# Altium PCB DC_Switch_2_5V_L.PcbDoc
Units mm, origin at the board's own origin, x right, y up, seen from the top; angles counter-clockwise.
Board outline 106.04 x 81.91 mm, 2 copper layers (Top Layer, Bottom Layer); 24 components, 104 nets, 306 pads, 77 vias.
Unrouted connection lines stored in the file: 5.
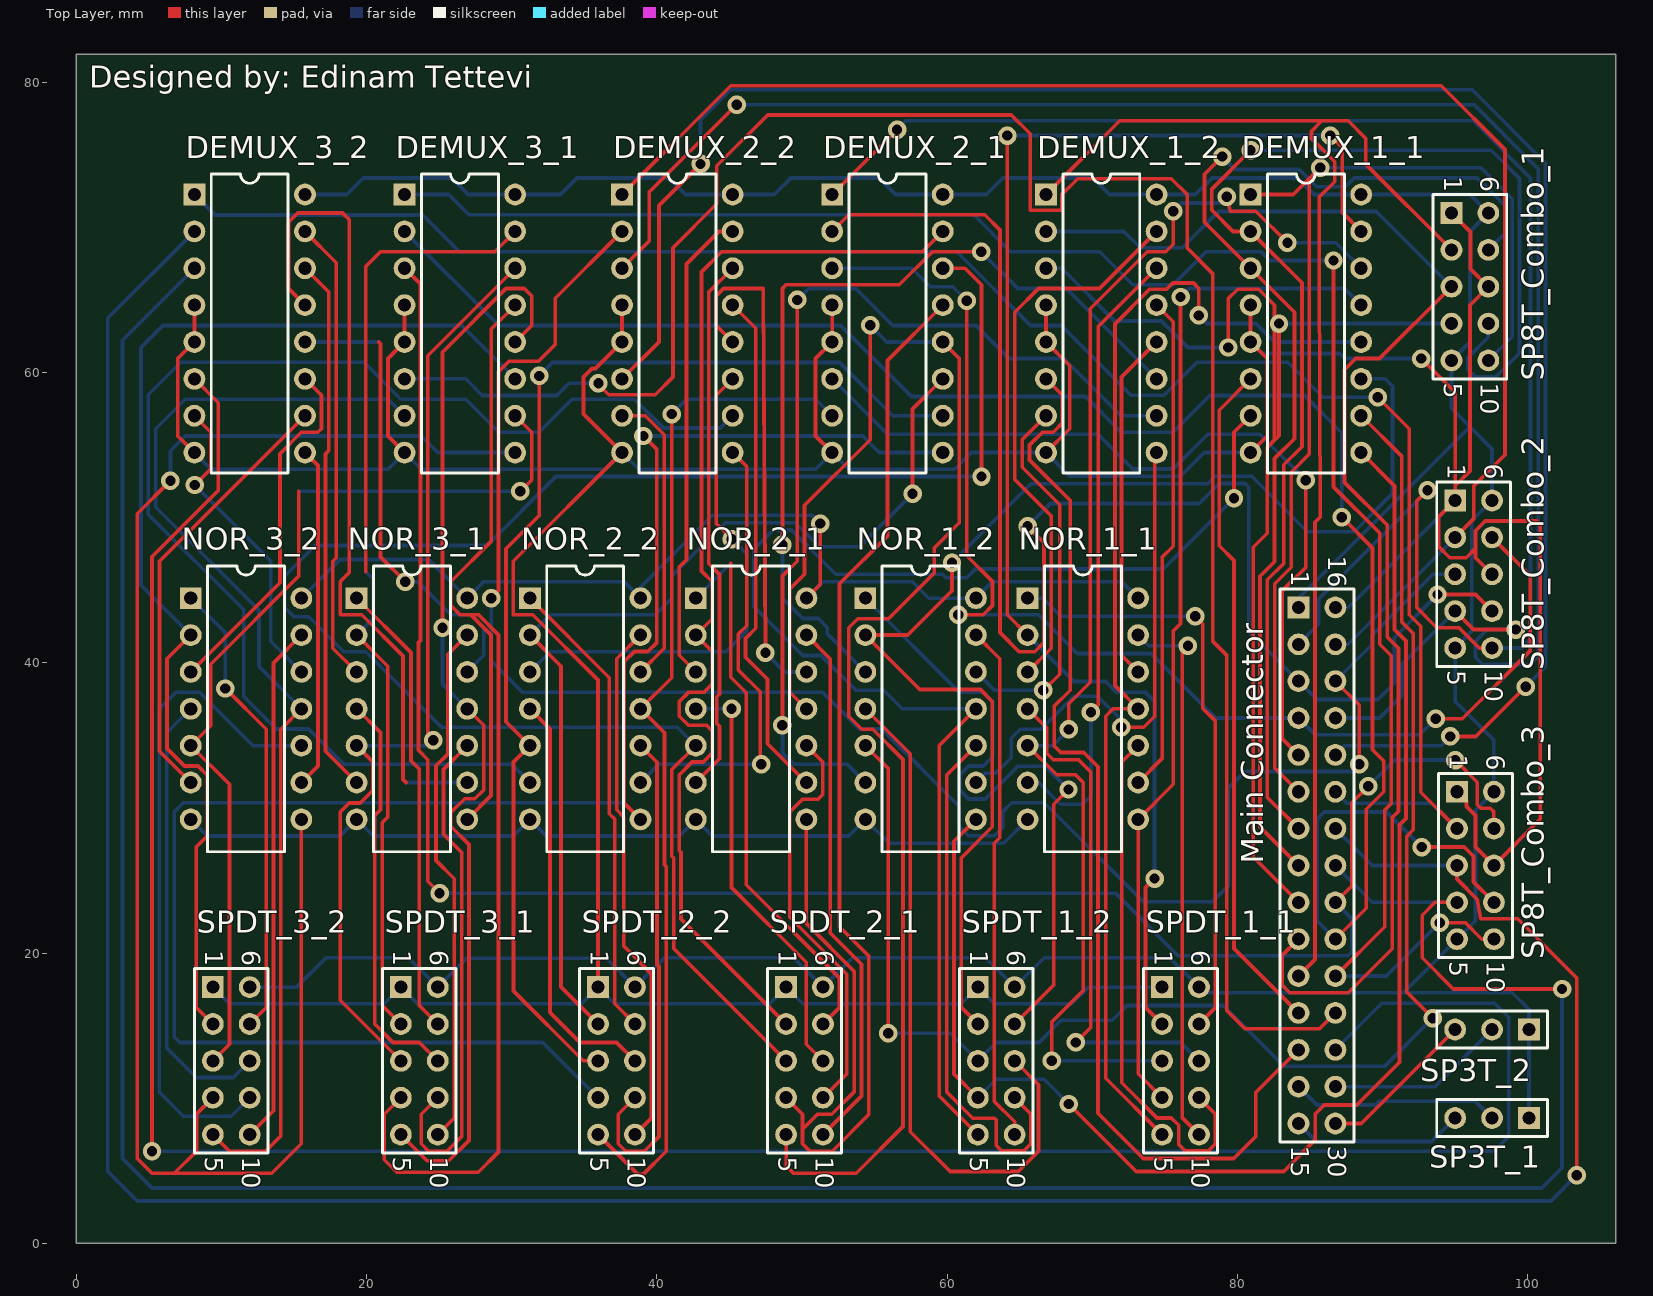
[diagram p0: Top Layer view]
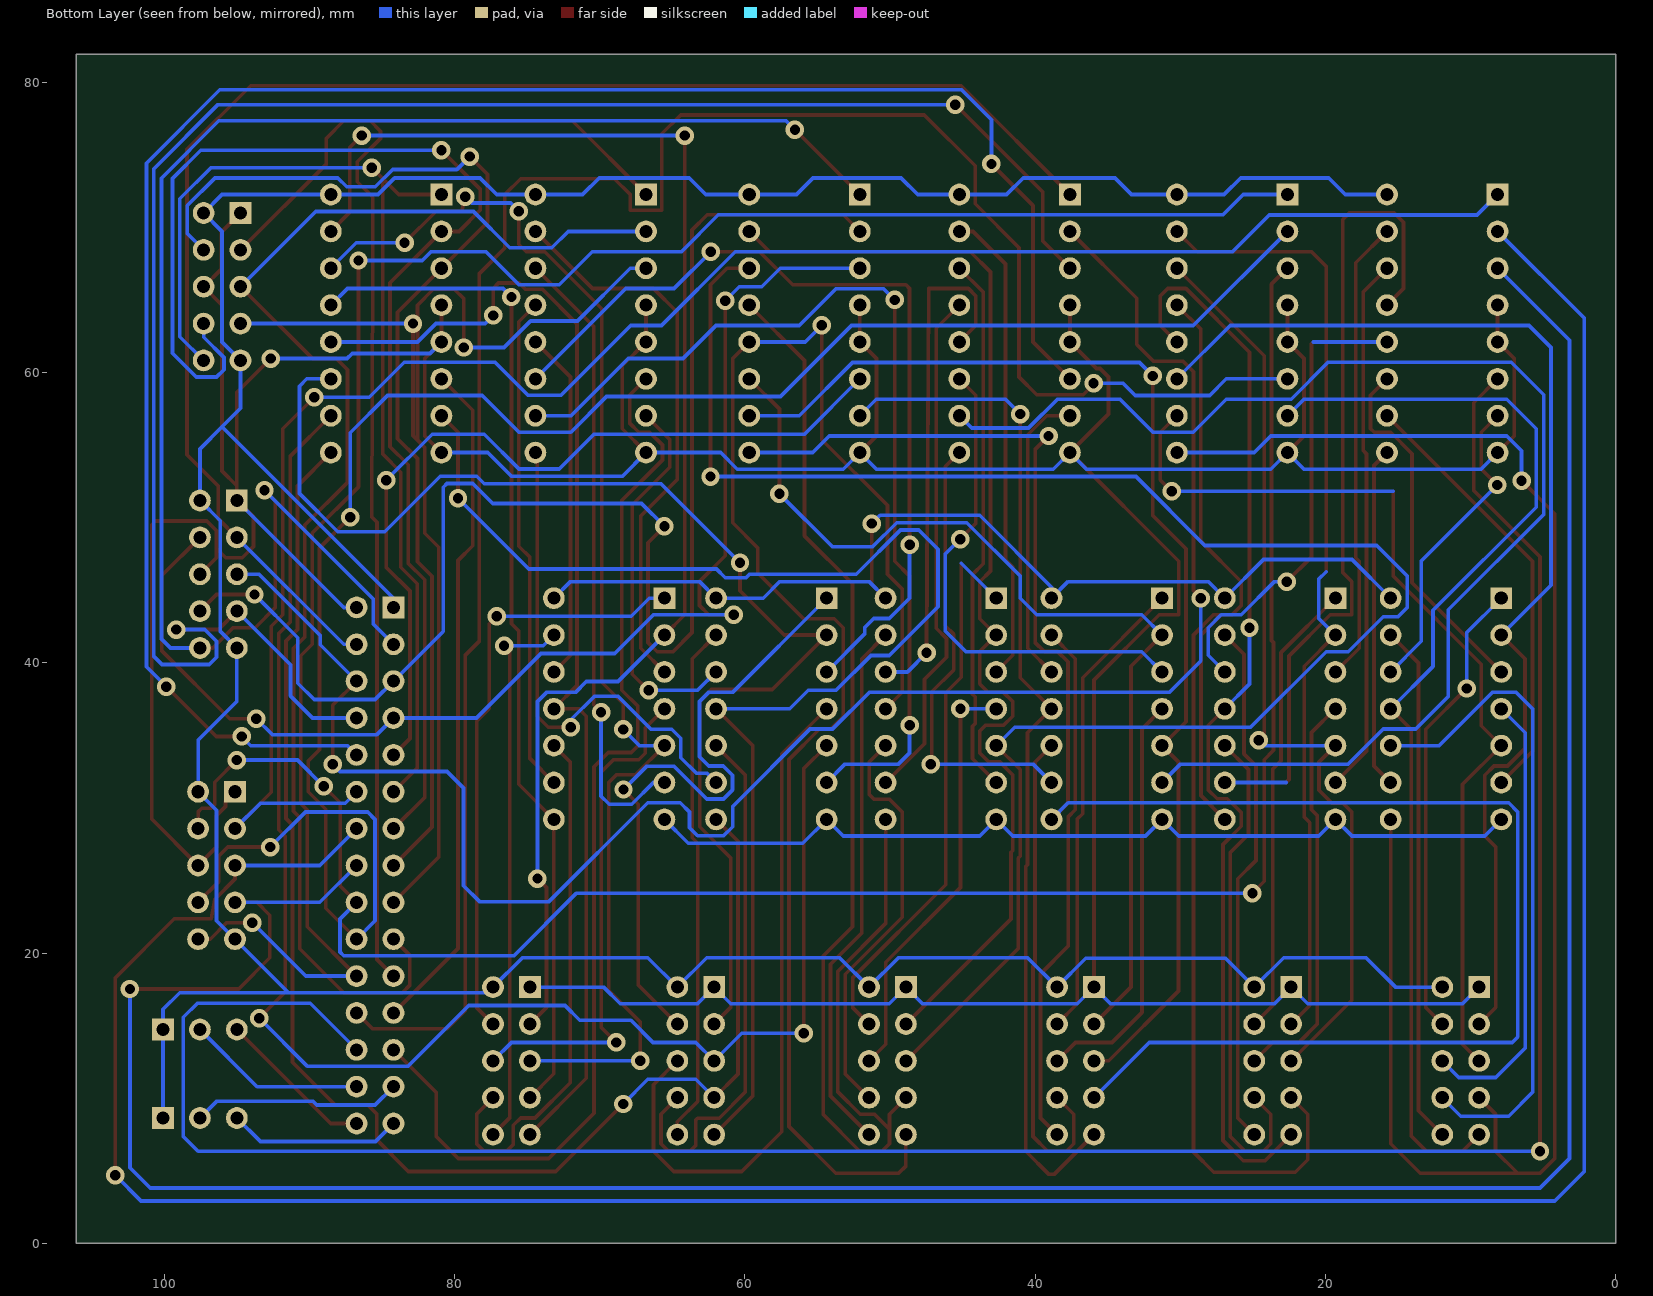
[diagram p1: Bottom Layer view, seen from below]

## Layer stack, top to bottom
Top Solder: solder mask 0.0102, Solder Resist, Dk 3.5
Top Layer: signal copper 0.0356
Dielectric 1: dielectric 0.32, FR-4, Dk 4.8
Bottom Layer: signal copper 0.0356
Bottom Solder: solder mask 0.0102, Solder Resist, Dk 3.5

## Board outline
0,0 106.045,0 106.045,81.915 0,81.915

## Design rules (kind name [scope] priority, off if disabled: settings)
Clearance [All] p1: gap=0.203
PolygonConnect [All] p1: connectstyle=Relief reliefconductorwidth=0.254 reliefentries=4 polygonreliefangle="90 Angle" airgapwidth=0.254
RoutingVias [All] p1: holewidth=0.711 width=1.27 viastyle="Through Hole" minholewidth=0.711 minwidth=1.27 maxholewidth=0.711 maxwidth=1.27
SolderMaskExpansion [All] p1: expansion=0.102
Width [All] p1: maxlimit=0.254 minlimit=0.254 preferedwidth=0.254
30 further rules are at their usual default settings.

## Components (designator, comment, footprint, x,y, rotation, side; value= is the part's Value field where it differs from the comment)
DEMUX_1_1 "CD54HCT238" J016D 84.709,63.373 r270 top
DEMUX_1_2 "CD54HCT238" J016D 70.612,63.373 r270 top
DEMUX_2_1 "CD54HCT238" J016D 55.88,63.373 r270 top
DEMUX_2_2 "CD54HCT238" J016D 41.402,63.373 r270 top
DEMUX_3_1 "CD54HCT238" J016D 26.416,63.373 r270 top
DEMUX_3_2 "CD54HCT238" J016D 11.938,63.373 r270 top
"Main Connector" "Arduino Pins" HDR2X15_CEN 84.201,43.815 r270 top
NOR_1_1 "SN74HC02N" N014 69.342,36.83 r270 top
NOR_1_2 "SN74HC02N" N014 58.166,36.83 r270 top
NOR_2_1 "SN74HC02N" N014 46.482,36.83 r270 top
NOR_2_2 "SN74HC02N" N014 35.052,36.83 r270 top
NOR_3_1 "SN74HC02N" N014 23.114,36.83 r270 top
NOR_3_2 "SN74HC02N" N014 11.684,36.83 r270 top
SP3T_1 "Cntrl" HDR1X3 100.076,8.636 r180 top
SP3T_2 "Cntrl" HDR1X3 100.076,14.732 r180 top
SP8T_Combo_1 "Cntrl" HDR2X5_CEN 94.742,70.993 r270 top
SP8T_Combo_2 "Cntrl" HDR2X5_CEN 94.996,51.181 r270 top
SP8T_Combo_3 "Cntrl" HDR2X5_CEN 95.123,31.115 r270 top
SPDT_1_1 "Cntrl" HDR2X5_CEN 74.803,17.653 r270 top
SPDT_1_2 "Cntrl" HDR2X5_CEN 62.103,17.653 r270 top
SPDT_2_1 "Cntrl" HDR2X5_CEN 48.895,17.653 r270 top
SPDT_2_2 "Cntrl" HDR2X5_CEN 35.941,17.653 r270 top
SPDT_3_1 "Cntrl" HDR2X5_CEN 22.352,17.653 r270 top
SPDT_3_2 "Cntrl" HDR2X5_CEN 9.398,17.653 r270 top

## Footprints (in the part's own frame and the unit in brackets; to place one, negate y for a bottom-side part, rotate by r counter-clockwise, add the part's x,y. Pads: shape width x height; smd on the part's side, far side on the other; paste and mask are expansions set on the pad)
HDR1X3 [mm] "Connector; Header; 3 Position"
  rect 1.5x1.5 hole 0.9: 1(0,0)
  round 1.5 hole 0.9: 2(2.54,0) 3(5.08,0)
  silkscreen extent -1.27,-1.27 6.35,1.27
HDR2X5_CEN [mm] "Connector; Header; 5x2 Position"
  rect 1.5x1.5 hole 0.9: 1(0,0)
  round 1.5 hole 0.9: 2(2.54,0) 3(5.08,0) 4(7.62,0) 5(10.16,0) 6(0,2.54) 7(2.54,2.54) 8(5.08,2.54) 9(7.62,2.54) 10(10.16,2.54)
  silkscreen extent -1.27,-1.27 11.43,3.81
HDR2X15_CEN [mm] "Connector; Header; 15x2 Position"
  rect 1.5x1.5 hole 0.9: 1(0,0)
  round 1.5 hole 0.9: 2(2.54,0) 3(5.08,0) 4(7.62,0) 5(10.16,0) 6(12.7,0) 7(15.24,0) 8(17.78,0) 9(20.32,0) 10(22.86,0) 11(25.4,0) 12(27.94,0) 13(30.48,0) 14(33.02,0) 15(35.56,0) 16(0,2.54) 17(2.54,2.54) 18(5.08,2.54) 19(7.62,2.54) 20(10.16,2.54) 21(12.7,2.54) 22(15.24,2.54) 23(17.78,2.54) 24(20.32,2.54) 25(22.86,2.54) 26(25.4,2.54) 27(27.94,2.54) 28(30.48,2.54) 29(33.02,2.54) 30(35.56,2.54)
  silkscreen extent -1.27,-1.27 36.83,3.81
J016D [mm] "DIP; 16 Leads; Row Spacing 7.62 mm; Pitch 2.54 mm"
  rect 1.5x1.5 hole 0.9: 1(-8.89,-3.81)
  round 1.5 hole 0.9: 2(-6.35,-3.81) 3(-3.81,-3.81) 4(-1.27,-3.81) 5(1.27,-3.81) 6(3.81,-3.81) 7(6.35,-3.81) 8(8.89,-3.81) 9(8.89,3.81) 10(6.35,3.81) 11(3.81,3.81) 12(1.27,3.81) 13(-1.27,3.81) 14(-3.81,3.81) 15(-6.35,3.81) 16(-8.89,3.81)
  silkscreen extent -10.3,-2.65 10.3,2.65
N014 [mm] "DIP; 14 Leads; Row Spacing 7.62 mm; Pitch 2.54 mm"
  rect 1.5x1.5 hole 0.9: 1(-7.62,-3.81)
  round 1.5 hole 0.9: 2(-5.08,-3.81) 3(-2.54,-3.81) 4(0,-3.81) 5(2.54,-3.81) 6(5.08,-3.81) 7(7.62,-3.81) 8(7.62,3.81) 9(5.08,3.81) 10(2.54,3.81) 11(0,3.81) 12(-2.54,3.81) 13(-5.08,3.81) 14(-7.62,3.81)
  silkscreen extent -9.85,-2.65 9.85,2.65

## Part data
DEMUX_1_1 DEMUX_1_2 DEMUX_2_1 DEMUX_2_2 DEMUX_3_1 DEMUX_3_2: library part SN54HC238J, "3-Line to 8-Line Decoder / Demultiplexer"
"Main Connector": library part "Header 15X2A", "Header, 15-Pin, Dual row"
NOR_1_1 NOR_1_2 NOR_2_1 NOR_2_2 NOR_3_1 NOR_3_2: "Quadruple 2-Input Positive-NOR Gate"
SP3T_1 SP3T_2: library part "Header 3", "Header, 3-Pin"
SP8T_Combo_1 SP8T_Combo_2 SP8T_Combo_3 SPDT_1_1 SPDT_1_2 SPDT_2_1 SPDT_2_2 SPDT_3_1 SPDT_3_2: library part "Header 5X2A", "Header, 5-Pin, Dual row"

## Via types
v1: diameter 1.27, hole 0.711, Top Layer to Bottom Layer, 77 vias

## Nets (pads, with @x,y where several pads share a name; then routed paths per layer and width w, separated by ;. In a path a pad name is that pad's centre, name@x,y a point inside that pad or via, vN(x,y) a via of type N, cw(c..) or ccw(c..) an arc to the next point about the centre after c; other vN are vias at no path point)
GND: NOR_1_1.7 NOR_1_2.7 NOR_2_1.7 NOR_2_2.7 NOR_3_1.7 NOR_3_2.7 | length 62.8
  Bottom Layer w0.254: NOR_3_2.7 9.017,28.067 18.161,28.067 NOR_3_1.7 20.447,28.067 30.099,28.067 NOR_2_2.7 32.385,28.067 41.529,28.067 NOR_2_1.7 43.815,28.067 53.213,28.067 NOR_1_2.7 55.995,27.571 63.893,27.571 NOR_1_1.7
NetDEMUX_1_1_1: "Main Connector.6" DEMUX_1_1.1 SP8T_Combo_1.10 | length 75.4
  Top Layer w0.254: 84.201,31.115 82.562,32.754 82.562,45.454 83.693,46.585 83.693,53.134 84.944,54.385 84.944,73.362 v1(85.7,74.117)
  Top Layer w0.255: DEMUX_1_1.1 83.845,72.263 84.944,73.362
  Bottom Layer w0.254: SP8T_Combo_1.10 98.921,62.472
  Bottom Layer w0.255: v1(85.7,74.117) 96.774,74.117 98.921,71.97 98.921,62.472
NetDEMUX_1_1_2: "Main Connector.7" DEMUX_1_1.2 SP8T_Combo_1.9 | length 92.6
  Top Layer w0.254: DEMUX_1_1.2 84.436,66.186 84.436,54.893 83.185,53.642 83.185,46.846 82.054,45.715 82.054,30.722 84.201,28.575
  Top Layer w0.255: DEMUX_1_1.2 79.694,69.723 78.232,71.185 78.232,72.644 v1(80.899,75.311)
  Bottom Layer w0.255: v1(80.899,75.311) 97.485,75.311 99.429,73.367 99.429,61.329 97.79,59.69 96.393,59.69 95.885,60.198 95.885,61.036 97.282,62.433 SP8T_Combo_1.9
NetDEMUX_1_1_3: "Main Connector.8" DEMUX_1_1.3 SP8T_Combo_1.7 | length 78.9
  Top Layer w0.254: v1(78.943,74.879) 77.724,73.66 77.724,70.358 DEMUX_1_1.3 83.922,64.16 83.922,55.443 82.55,54.072 82.55,46.965 81.546,45.961 81.546,28.69 84.201,26.035
  Bottom Layer w0.254: v1(78.943,74.879) 79.832,73.99 84.259,73.99 85.453,72.796 87.427,72.796 88.036,73.406 96.508,73.406 98.413,71.501 98.413,69.584 SP8T_Combo_1.7
NetDEMUX_1_1_4: "Main Connector.16" DEMUX_1_1.4 DEMUX_1_1.5 DEMUX_1_1.8 DEMUX_1_2.4 DEMUX_1_2.5 DEMUX_1_2.8 DEMUX_2_1.4 DEMUX_2_1.5 DEMUX_2_1.8 DEMUX_2_2.4 DEMUX_2_2.5 DEMUX_2_2.8 DEMUX_3_1.4 DEMUX_3_1.5 DEMUX_3_1.8 DEMUX_3_2.4 DEMUX_3_2.5 DEMUX_3_2.8 SP8T_Combo_1.1 SP8T_Combo_1.8 SP8T_Combo_2.1 SP8T_Combo_2.8 SP8T_Combo_3.1 SP8T_Combo_3.8 SPDT_1_1.1 SPDT_1_2.1 SPDT_2_1.1 SPDT_2_2.1 SPDT_3_1.1 SPDT_3_2.1 | length 360.8
  Top Layer w0.254: DEMUX_3_2.8 6.985,55.626 6.985,60.96 DEMUX_3_2.5 DEMUX_3_2.4 ; DEMUX_3_1.8 21.463,55.626 21.463,60.96 DEMUX_3_1.5 DEMUX_3_1.4 ; SPDT_2_2.1 35.941,38.811 31.445,43.307 30.099,43.307 30.099,46.99 DEMUX_2_2.8 34.937,57.138 34.937,59.69 35.528,60.281 35.77,60.281 DEMUX_2_2.5 DEMUX_2_2.4 ; DEMUX_2_1.8 50.927,55.626 50.927,60.96 DEMUX_2_1.5 DEMUX_2_1.4 ; DEMUX_1_2.8 68.441,56.122 68.441,60.464 DEMUX_1_2.5 DEMUX_1_2.4 ; DEMUX_1_1.8 82.042,55.626 82.042,60.96 DEMUX_1_1.5 DEMUX_1_1.4 ; v1(92.659,60.96) 94.996,58.623 94.996,52.197 ; SP8T_Combo_1.1 96.054,69.681 96.054,67.141 SP8T_Combo_1.8 96.012,64.643 96.012,53.213 94.996,52.197 ; SP8T_Combo_2.1 94.996,52.197 ; SP8T_Combo_3.1 95.771,30.467 95.771,30.098 96.393,29.476 96.393,27.305 SP8T_Combo_3.8 100.863,29.235 100.863,49.518 100.609,49.772 97.068,49.772 96.393,49.098 96.393,47.879 96.393,47.244 SP8T_Combo_2.8
  Top Layer w0.255: SP8T_Combo_2.1 93.853,50.038 93.853,48.006 94.615,47.244 95.758,47.244 96.393,47.879
  Bottom Layer w0.254: DEMUX_3_2.8 9.271,53.34 21.463,53.34 DEMUX_3_1.8 23.749,53.34 36.449,53.34 DEMUX_2_2.8 38.735,53.34 50.927,53.34 DEMUX_2_1.8 53.213,53.34 60.514,53.34 61.657,54.483 DEMUX_1_2.8 68.441,52.844 76.061,52.844 77.7,54.483 DEMUX_1_1.8 ; SPDT_3_2.1 10.541,16.51 21.209,16.51 SPDT_3_1.1 23.495,16.51 34.798,16.51 SPDT_2_2.1 37.084,16.51 47.752,16.51 SPDT_2_1.1 50.038,16.51 60.96,16.51 SPDT_1_2.1 63.246,16.51 68.58,16.51 69.723,17.653 SPDT_1_1.1 ; DEMUX_1_1.5 81.686,61.316 87.046,61.316 87.401,60.96 v1(92.659,60.96) ; 86.741,43.815 87.63,43.815 SP8T_Combo_2.1
NetDEMUX_1_1_6: "Main Connector.12" DEMUX_1_1.6 | length 46.8
  Top Layer w0.254: DEMUX_1_1.6 78.74,57.404 78.74,48.063 79.756,47.047 79.756,20.32 84.201,15.875
NetDEMUX_1_1_7: DEMUX_1_1.7 NOR_1_2.11 SPDT_1_2.5 | length 97.1
  Top Layer w0.254: NOR_1_2.11 59.448,34.302 59.448,10.148 SPDT_1_2.5
  Top Layer w0.255: v1(79.756,51.333) 79.756,55.88 DEMUX_1_1.7
  Bottom Layer w0.255: NOR_1_2.11 56.896,36.83 55.626,38.1 53.709,38.1 51.308,40.501 50.038,40.501 46.685,43.854 46.685,47.828 48.006,49.149 49.276,49.149 52.324,46.101 59.665,46.101 59.908,45.857 61.341,45.857 61.94,46.457 74.879,46.457 v1(79.756,51.333)
NetDEMUX_1_1_9: DEMUX_1_1.9 NOR_1_2.8 SPDT_1_2.4 | length 100.3
  Top Layer w0.254: NOR_1_2.8 60.464,27.698 60.464,11.672 SPDT_1_2.4 ; v1(68.377,9.601) 73.025,4.953 83.185,4.953 85.344,7.112 85.344,8.89 85.979,9.525 88.214,9.525 91.161,12.471 91.161,28.829 91.602,29.27 91.602,41.506 90.817,42.291 90.817,52.185 DEMUX_1_1.9
  Bottom Layer w0.254: SPDT_1_2.4 63.373,11.303 66.675,11.303 v1(68.377,9.601)
NetDEMUX_1_1_10: DEMUX_1_1.10 NOR_1_2.5 SPDT_1_2.3 | length 107.4
  Top Layer w0.254: NOR_1_2.5 55.931,32.715 v1(55.931,14.478) ; DEMUX_1_1.10 91.325,54.217 91.325,42.799 92.11,42.014 92.11,28.495 91.669,28.054 91.669,17.297 v1(93.447,15.519)
  Bottom Layer w0.254: v1(55.931,14.478) 60.198,14.478 SPDT_1_2.3 63.373,13.843 66.319,13.843 67.843,15.367 71.374,15.367 72.39,16.383 79.019,16.383 83.21,12.192 90.119,12.192 v1(93.447,15.519)
NetDEMUX_1_1_11: DEMUX_1_1.11 NOR_1_2.2 SPDT_1_2.2 | length 88.7
  Top Layer w0.254: v1(60.325,46.888) 60.325,44.958 57.277,41.91 NOR_1_2.2 58.104,38.162 62.283,38.162 63.107,37.338 63.107,28.702 60.972,26.567 60.972,16.244 SPDT_1_2.2
  Bottom Layer w0.254: v1(60.325,46.888) 65.773,52.336 77.951,52.336 78.473,52.857 80.975,52.857 84.811,49.022 88.036,49.022 90.678,51.664 90.678,59.055 90.17,59.563 DEMUX_1_1.11
NetDEMUX_1_1_12: DEMUX_1_1.12 NOR_1_1.11 SPDT_1_1.5 | length 81
  Top Layer w0.254: SPDT_1_1.5 70.917,11.379 70.917,36.322 71.425,36.83 NOR_1_1.11 71.552,38.43 71.552,63.348 73.939,65.735 75.108,65.735 75.54,66.167 76.962,66.167 77.318,65.811 v1(77.318,63.932)
  Bottom Layer w0.254: v1(77.318,63.932) 77.876,63.373 81.28,63.373 82.55,62.103 DEMUX_1_1.12
NetDEMUX_1_1_13: DEMUX_1_1.13 NOR_1_1.8 SPDT_1_1.4 | length 70.2
  Top Layer w0.254: SPDT_1_1.4 73.152,11.684 NOR_1_1.8 75.565,31.623 75.565,42.189 76.073,42.697 v1(76.073,65.202)
  Bottom Layer w0.254: v1(76.073,65.202) 76.657,65.786 87.376,65.786 DEMUX_1_1.13
NetDEMUX_1_1_14: DEMUX_1_1.14 NOR_1_1.5 SPDT_1_1.3 | length 91.1
  Top Layer w0.254: NOR_1_1.5 67.539,32.283 68.834,32.283 69.367,31.75 69.367,17.424 67.208,15.265 v1(67.208,12.573)
  Top Layer w0.255: v1(68.377,35.408) 68.377,37.186 69.85,38.659 69.85,64.389 73.787,68.326 75.057,68.326 75.565,68.834 v1(75.565,71.12) ; v1(79.248,72.111) 79.502,71.12 81.255,71.12 v1(83.439,68.936)
  Bottom Layer w0.254: v1(67.208,12.573) SPDT_1_1.3
  Bottom Layer w0.255: NOR_1_1.5 67.259,34.29 v1(68.377,35.408) ; v1(75.565,71.12) 76.124,71.679 78.816,71.679 v1(79.248,72.111) ; v1(83.439,68.936) 86.766,68.936 DEMUX_1_1.14
NetDEMUX_1_1_15: DEMUX_1_1.15 NOR_1_1.2 SPDT_1_1.2 | length 98.3
  Top Layer w0.254: v1(64.135,76.327) 64.135,43.307 NOR_1_1.2 ; v1(74.283,25.134) 73.66,24.511 73.66,16.256 SPDT_1_1.2 ; v1(86.385,76.327) 87.224,75.489 87.224,71.018 DEMUX_1_1.15
  Bottom Layer w0.254: v1(64.135,76.327) v1(86.385,76.327) ; NOR_1_1.2 68.732,38.71 70.917,38.71 71.665,37.961 73.66,37.961 74.283,37.338 v1(74.283,25.134)
NetDEMUX_1_1_16: "Main Connector.1" DEMUX_1_1.16 DEMUX_1_2.16 DEMUX_2_1.16 DEMUX_2_2.16 DEMUX_3_1.16 DEMUX_3_2.16 SP3T_1.1 SP3T_2.1 SP8T_Combo_1.5 SP8T_Combo_1.6 SP8T_Combo_2.5 SP8T_Combo_2.6 SP8T_Combo_3.5 SP8T_Combo_3.6 SPDT_1_1.6 SPDT_1_2.6 SPDT_2_1.6 SPDT_2_2.6 SPDT_3_1.6 SPDT_3_2.6 | length 269.7
  Bottom Layer w0.254: SPDT_3_2.6 15.164,17.653 17.196,19.685 22.86,19.685 SPDT_3_1.6 26.873,19.634 36.5,19.634 SPDT_2_2.6 40.513,19.685 49.403,19.685 SPDT_2_1.6 53.467,19.685 62.611,19.685 SPDT_1_2.6 66.675,19.685 75.311,19.685 SPDT_1_1.6 77.343,17.272 91.44,17.272 ; DEMUX_3_2.16 18.618,72.263 19.761,73.406 25.832,73.406 26.975,72.263 DEMUX_3_1.16 33.35,72.263 34.493,73.406 40.818,73.406 41.961,72.263 DEMUX_2_2.16 48.082,72.263 49.225,73.406 55.296,73.406 56.439,72.263 DEMUX_2_1.16 62.687,72.263 63.83,73.406 70.028,73.406 71.171,72.263 DEMUX_1_2.16 77.089,72.263 78.232,73.406 84.125,73.406 85.268,72.263 DEMUX_1_1.16 96.012,72.263 SP8T_Combo_1.6 96.012,69.723 96.012,62.103 SP8T_Combo_1.5 94.742,57.531 96.012,56.261 ; 84.201,43.815 84.201,44.45 96.012,56.261 ; SP3T_1.1 SP3T_2.1 100.076,16.129 98.933,17.272 91.44,17.272 ; 91.44,17.272 SP8T_Combo_3.5 96.393,22.225 96.393,29.845 SP8T_Combo_3.6 97.663,34.671 94.996,37.338 SP8T_Combo_2.5 96.127,42.152 96.127,49.391 96.139,49.403 96.139,49.784 SP8T_Combo_2.6 97.536,54.737 96.012,56.261
NetDEMUX_1_2_1: "Main Connector.11" DEMUX_1_2.1 SP8T_Combo_1.2 | length 95.7
  Top Layer w0.254: DEMUX_1_2.1 71.882,77.343 85.801,77.343 87.63,77.343 88.824,76.149 ; 88.824,74.371 SP8T_Combo_1.2
  Top Layer w0.255: 84.201,18.415 85.344,19.558 85.344,49.682 85.7,50.038 85.623,66.929 85.623,72.085 86.69,73.152 86.69,74.524 85.09,76.124 85.09,76.632 85.801,77.343 ; 88.824,74.371 88.824,76.149
NetDEMUX_1_2_2: "Main Connector.10" DEMUX_1_2.2 SP8T_Combo_1.3 | length 95.6
  Top Layer w0.254: 84.201,20.955 83.07,19.824 83.07,17.793 83.591,17.272 87.63,17.272 90.653,20.295 90.653,29.337 91.094,29.778 91.094,40.998 90.309,41.783 90.309,49.489 87.376,52.422 87.376,60.198 88.138,60.96 89.789,60.96 SP8T_Combo_1.3
  Bottom Layer w0.254: DEMUX_1_2.2 72.16,69.723 73.291,68.592 76.187,68.592 78.69,71.095 89.56,71.095 SP8T_Combo_1.3
NetDEMUX_1_2_3: "Main Connector.9" DEMUX_1_2.3 SP8T_Combo_1.4 | length 85.2
  Top Layer w0.254: v1(79.35,61.722) 79.35,65.075 80.01,65.735 81.458,65.735 82.55,64.643 82.55,55.347 ; v1(82.855,63.373) 82.855,55.651 82.55,55.347 ; 84.201,23.495 81.077,26.619 81.077,47.955 82.042,48.92 82.042,54.839 82.55,55.347
  Bottom Layer w0.254: DEMUX_1_2.3 67.894,67.183 71.526,63.551 74.752,63.551 76.581,61.722 v1(79.35,61.722) ; v1(82.855,63.373) SP8T_Combo_1.4
NetDEMUX_1_2_6: "Main Connector.13" DEMUX_1_2.6 | length 76.2
  Top Layer w0.254: DEMUX_1_2.6 67.933,58.432 67.933,56.515 67.31,55.892 66.56,55.892 65.671,55.003 65.671,53.975 68.47,51.176 68.47,38.108 67.361,36.999 67.361,34.277 67.818,33.82 69.406,33.82 70.383,32.842 70.383,8.966 73.508,5.842 79.731,5.842 81.255,7.366 81.255,10.389 84.201,13.335
NetDEMUX_1_2_7: DEMUX_1_2.7 NOR_1_2.12 | length 26.3
  Top Layer w0.254: v1(66.624,38.1) 67.742,39.218 67.742,50.888 65.163,53.467 65.163,55.384 DEMUX_1_2.7
  Bottom Layer w0.254: NOR_1_2.12 63.246,38.1 v1(66.624,38.1)
NetDEMUX_1_2_9: DEMUX_1_2.9 NOR_1_2.9 | length 35.3
  Top Layer w0.255: v1(71.984,35.56) 73.533,35.56 74.295,36.322 74.295,54.356 DEMUX_1_2.9
  Bottom Layer w0.255: NOR_1_2.9 62.624,32.398 63.339,32.398 64.401,33.46 64.401,34.798 65.024,35.421 66.46,35.421 68.732,37.694 70.358,37.694 71.984,36.068 v1(71.984,35.56)
NetDEMUX_1_2_10: DEMUX_1_2.10 NOR_1_2.6 | length 66.9
  Top Layer w0.254: v1(48.641,35.687) 48.641,45.974 49.657,46.99 v1(49.657,65)
  Bottom Layer w0.254: v1(48.641,35.687) 48.641,33.782 49.403,33.02 53.086,33.02 NOR_1_2.6 ; v1(49.657,65) 50.431,65.774 53.709,65.774 56.237,63.246 61.976,63.246 64.25,60.972 68.026,60.972 71.975,57.023 DEMUX_1_2.10
NetDEMUX_1_2_11: DEMUX_1_2.11 NOR_1_2.3 | length 59.9
  Top Layer w0.254: v1(48.641,48.133) 48.641,65.786 48.895,66.04 56.693,66.04 58.979,68.326 v1(62.332,68.326)
  Bottom Layer w0.254: v1(48.641,48.133) 48.641,44.45 50.038,43.053 51.105,43.053 51.74,42.418 51.74,41.986 NOR_1_2.3 ; v1(62.332,68.326) 64.872,65.786 68.199,65.786 DEMUX_1_2.11
NetDEMUX_1_2_12: DEMUX_1_2.12 NOR_1_1.12 | length 24.2
  Top Layer w0.254: NOR_1_1.12 72.009,40.513 72.009,59.69 DEMUX_1_2.12
NetDEMUX_1_2_13: DEMUX_1_2.13 NOR_1_1.9 | length 34.4
  Top Layer w0.255: NOR_1_1.9 74.803,33.401 74.803,47.269 75.565,48.031 75.565,63.5 DEMUX_1_2.13
NetDEMUX_1_2_14: DEMUX_1_2.14 NOR_1_1.6 | length 43.5
  Top Layer w0.254: v1(69.901,36.601) 70.409,37.109 70.409,63.17 DEMUX_1_2.14
  Bottom Layer w0.254: NOR_1_1.6 66.294,31.75 67.793,30.251 69.342,30.251 69.901,30.81 v1(69.901,36.601)
NetDEMUX_1_2_15: DEMUX_1_2.15 NOR_1_1.3 | length 38.6
  Top Layer w0.254: NOR_1_1.3 67.171,41.009 67.171,50.113 64.655,52.629 64.655,64.147 66.294,65.786 70.485,65.786 DEMUX_1_2.15
NetDEMUX_2_1_1: "Main Connector.2" DEMUX_2_1.1 SP8T_Combo_2.10 | length 115.6
  Top Layer w0.254: DEMUX_2_1.1 v1(56.54,76.733) ; v1(93.091,51.892) 92.341,51.142 92.341,43.803 93.726,42.418 95.262,42.418 96.659,41.021 SP8T_Combo_2.10
  Bottom Layer w0.254: v1(56.54,76.733) 57.15,77.343 96.242,77.343 100.191,73.394 100.191,41.644 99.568,41.021 SP8T_Combo_2.10 ; 84.201,41.275 85.598,42.672 85.598,44.399 v1(93.091,51.892)
NetDEMUX_2_1_2: "Main Connector.3" DEMUX_2_1.2 SP8T_Combo_2.9 | length 103
  Top Layer w0.254: DEMUX_2_1.2 53.213,70.866 62.586,70.866 63.627,69.825 63.627,42.088 64.948,40.767 66.028,40.767 66.663,41.402 66.663,48.272 v1(65.532,49.403) ; v1(93.777,44.704) 96.393,44.704 SP8T_Combo_2.9
  Bottom Layer w0.254: v1(65.532,49.403) 67.107,50.978 77.368,50.978 78.74,52.349 80.518,52.349 80.772,52.095 80.772,42.164 84.201,38.735 85.471,37.465 89.662,37.465 90.792,38.595 90.792,41.719 v1(93.777,44.704)
NetDEMUX_2_1_3: "Main Connector.4" DEMUX_2_1.3 SP8T_Combo_2.7 | length 88.7
  Top Layer w0.254: v1(60.757,43.307) 62.484,43.307 63.119,43.942 63.119,45.593 61.341,47.371 v1(61.341,64.948) ; v1(93.65,36.144) 95.479,36.144 100.178,40.843 100.178,45.999 SP8T_Combo_2.7
  Bottom Layer w0.254: DEMUX_2_1.3 57.556,67.183 58.826,65.913 60.376,65.913 v1(61.341,64.948) ; v1(60.757,43.307) 66.294,43.307 68.961,40.64 74.041,40.64 78.486,36.195 84.201,36.195 85.344,35.052 92.558,35.052 v1(93.65,36.144)
NetDEMUX_2_1_6: "Main Connector.5" DEMUX_2_1.6 | length 57.6
  Top Layer w0.255: 84.201,33.655 83.07,34.786 83.07,44.946 84.709,46.585 v1(84.709,52.578)
  Bottom Layer w0.255: DEMUX_2_1.6 55.88,55.753 70.382,55.753 72.783,53.352 75.553,53.352 77.954,55.753 81.534,55.753 v1(84.709,52.578)
NetDEMUX_2_1_7: DEMUX_2_1.7 NOR_2_2.11 SPDT_2_2.5 | length 70.9
  Top Layer w0.254: NOR_2_2.11 41.009,38.977 v1(41.009,57.138)
  Top Layer w0.255: SPDT_2_2.5 38.684,4.75 39.04,4.75 40.64,6.35 40.64,25.972 40.513,26.099 40.513,35.179 NOR_2_2.11
  Bottom Layer w0.254: v1(41.009,57.138) 42.025,58.154 50.939,58.154 DEMUX_2_1.7
NetDEMUX_2_1_9: DEMUX_2_1.9 NOR_2_2.8 SPDT_2_2.4 | length 129.2
  Top Layer w0.255: NOR_2_2.8 37.731,30.341 37.731,40.068 38.442,40.779 39.37,40.779 39.993,41.402 39.993,54.698 v1(39.065,55.626)
  Bottom Layer w0.254: SPDT_2_2.4 32.131,13.843 7.112,13.843 6.731,14.224 6.731,29.718 7.366,30.353 37.719,30.353 NOR_2_2.8
  Bottom Layer w0.255: v1(39.065,55.626) 54.178,55.626 55.321,54.483 DEMUX_2_1.9
NetDEMUX_2_1_10: DEMUX_2_1.10 NOR_2_2.5 SPDT_2_2.3 | length 82
  Top Layer w0.254: v1(31.877,59.766) 31.877,50.14 29.591,47.854 29.591,35.941 NOR_2_2.5 30.111,33.159 30.111,17.387 34.925,12.573 SPDT_2_2.3
  Bottom Layer w0.254: v1(31.877,59.766) 32.805,60.694 52.578,60.694 56.249,57.023 DEMUX_2_1.10
NetDEMUX_2_1_11: DEMUX_2_1.11 NOR_2_2.2 SPDT_2_2.2 | length 70.2
  Top Layer w0.254: NOR_2_2.2 33.389,39.763 33.389,17.665 SPDT_2_2.2 ; v1(57.607,51.638) 57.607,57.48 DEMUX_2_1.11
  Bottom Layer w0.254: NOR_2_2.2 32.639,43.307 39.878,43.307 41.021,44.45 41.021,45.974 44.704,49.657 49.53,49.657 51.181,48.006 53.975,48.006 v1(57.607,51.638)
NetDEMUX_2_1_12: DEMUX_2_1.12 NOR_2_1.11 SPDT_2_1.5 | length 107.3
  Top Layer w0.254: SPDT_2_1.5 48.895,5.334 49.403,4.826 53.721,4.826 56.947,8.052 56.947,33.338 54.864,35.421 54.102,35.421 53.213,36.31 53.213,42.418 53.836,43.041 55.944,43.041 59.112,46.209 59.112,47.93 60.833,49.651 60.833,60.96 DEMUX_2_1.12 ; NOR_2_1.11 49.149,37.973 49.149,45.085 50.165,46.101 50.165,50.851 54.686,55.372 v1(54.686,63.246)
  Bottom Layer w0.254: v1(54.686,63.246) 55.829,62.103 DEMUX_2_1.12
NetDEMUX_2_1_13: DEMUX_2_1.13 NOR_2_1.8 SPDT_2_1.4 | length 93.8
  Top Layer w0.254: SPDT_2_1.4 50.026,8.902 50.026,7.862 50.026,6.858 50.534,6.35 52.07,6.35 54.598,8.878 54.598,19.8 52.578,21.82 52.578,45.441 55.88,48.743 55.88,60.833 DEMUX_2_1.13
  Top Layer w0.255: 50.026,7.862 51.054,8.89 52.045,8.89 53.582,10.427 53.582,18.752 50.292,22.042 NOR_2_1.8
NetDEMUX_2_1_14: DEMUX_2_1.14 NOR_2_1.5 SPDT_2_1.3 | length 127.3
  Top Layer w0.254: NOR_2_1.5 41.021,32.639 41.021,26.67 41.148,26.543 41.148,20.32 SPDT_2_1.3 ; DEMUX_2_1.14 61.214,67.183 62.357,66.04 v1(62.357,52.832)
  Bottom Layer w0.254: NOR_2_1.5 41.402,35.56 25.146,35.56 19.939,40.767 18.415,40.767 16.002,43.18 14.986,43.18 14.351,43.815 14.351,45.974 16.459,48.082 28.296,48.082 33.045,52.832 v1(62.357,52.832)
NetDEMUX_2_1_15: DEMUX_2_1.15 NOR_2_1.2 SPDT_2_1.2 | length 78.5
  Top Layer w0.254: NOR_2_1.2 43.803,40.779 43.803,38.545 43.219,37.961 42.164,37.961 41.541,37.338 41.541,36.322 42.164,35.699 43.41,35.699 43.803,35.306 43.803,33.782 43.18,33.159 42.418,33.159 41.529,32.27 41.529,27.051 41.656,26.924 41.656,22.352 SPDT_2_1.2
  Top Layer w0.255: NOR_2_1.2 43.803,43.041 43.803,45.581 43.065,46.319 43.065,66.929 44.462,68.326 58.293,68.326 DEMUX_2_1.15
NetDEMUX_2_2_1: "Main Connector.17" DEMUX_2_2.1 SP8T_Combo_2.2 | length 105.2
  Top Layer w0.254: DEMUX_2_2.1 45.085,79.756 94.031,79.756 98.425,75.362 98.425,54.331 96.266,52.172 96.266,49.911 SP8T_Combo_2.2
  Bottom Layer w0.254: 86.741,41.275 87.63,41.275 SP8T_Combo_2.2
NetDEMUX_2_2_2: "Main Connector.18" DEMUX_2_2.2 SP8T_Combo_2.3 | length 130.5
  Top Layer w0.254: v1(28.575,44.45) 29.083,44.958 29.083,60.059 29.806,60.782 31.838,60.782 32.995,61.939 32.995,65.126 DEMUX_2_2.2 ; 86.741,38.735 88.392,37.084 v1(88.392,33.02)
  Bottom Layer w0.254: v1(28.575,44.45) 28.575,40.132 30.746,37.961 51.423,37.961 53.951,35.433 55.499,35.433 60.833,30.099 60.833,28.702 61.456,28.079 63.246,28.079 63.805,28.638 63.805,29.718 64.44,30.353 66.675,30.353 73.482,23.546 78.283,23.546 79.375,24.638 79.375,31.369 80.518,32.512 87.884,32.512 v1(88.392,33.02) ; 86.741,38.735 89.249,41.243 89.249,41.878 93.472,46.101 SP8T_Combo_2.3
NetDEMUX_2_2_3: "Main Connector.19" DEMUX_2_2.3 SP8T_Combo_2.4 | length 131.4
  Top Layer w0.254: DEMUX_2_2.3 39.472,69.063 39.472,72.441 v1(45.491,78.461) ; SP8T_Combo_2.4 96.266,42.291 v1(99.162,42.291)
  Bottom Layer w0.254: v1(45.491,78.461) 96.291,78.461 100.711,74.041 100.711,40.437 100.152,39.878 96.901,39.878 96.393,40.386 96.393,41.478 97.207,42.291 v1(99.162,42.291) ; 86.741,36.195 89.776,36.195 91.3,37.719 91.3,39.865 SP8T_Combo_2.4
NetDEMUX_2_2_6: "Main Connector.20" DEMUX_2_2.6 | length 132.9
  Top Layer w0.255: DEMUX_2_2.6 40.132,62.103 40.132,71.501 v1(43.002,74.371) ; v1(94.666,34.925) 96.418,34.925 v1(99.847,38.354)
  Bottom Layer w0.255: v1(43.002,74.371) 43.002,77.408 45.071,79.477 96.164,79.477 101.219,74.422 101.219,39.726 v1(99.847,38.354) ; 86.741,33.655 87.376,34.29 94.031,34.29 v1(94.666,34.925)
NetDEMUX_2_2_7: DEMUX_2_2.7 NOR_2_2.12 | length 20.5
  Top Layer w0.254: DEMUX_2_2.7 39.194,57.023 40.501,55.716 40.501,41.009 NOR_2_2.12
NetDEMUX_2_2_9: DEMUX_2_2.9 NOR_2_2.9 | length 31.6
  Top Layer w0.254: DEMUX_2_2.9 46.177,53.518 46.177,42.559 45.593,41.975 45.593,39.511 47.106,37.998 47.106,33.107 v1(47.193,33.02)
  Bottom Layer w0.254: NOR_2_2.9 40.132,33.02 v1(47.193,33.02)
NetDEMUX_2_2_10: DEMUX_2_2.10 NOR_2_2.6 | length 91
  Bottom Layer w0.254: NOR_2_2.6 29.972,33.02 18.415,33.02 16.002,35.433 13.767,35.433 11.518,37.681 11.518,43.65 4.953,50.216 4.953,58.471 7.188,60.706 19.812,60.706 22.352,58.166 26.821,58.166 29.095,55.892 31.865,55.892 34.139,58.166 38.457,58.166 40.45,56.173 44.362,56.173 DEMUX_2_2.10
NetDEMUX_2_2_11: DEMUX_2_2.11 NOR_2_2.3 | length 34.8
  Top Layer w0.255: v1(45.161,48.514) 44.081,49.594 44.081,58.432 DEMUX_2_2.11
  Bottom Layer w0.255: NOR_2_2.3 32.639,40.767 44.755,40.767 46.177,42.189 46.177,47.498 v1(45.161,48.514)
NetDEMUX_2_2_12: DEMUX_2_2.12 NOR_2_1.12 | length 35.6
  Top Layer w0.254: DEMUX_2_2.12 44.081,63.234 44.081,65.278 44.589,65.786 47.32,65.786 v1(47.473,40.691)
  Bottom Layer w0.254: v1(47.473,40.691) 48.793,39.37 NOR_2_1.12
NetDEMUX_2_2_13: DEMUX_2_2.13 NOR_2_1.9 | length 35.6
  Top Layer w0.254: DEMUX_2_2.13 46.812,63.043 46.812,42.382 46.101,41.67 46.101,40.386 47.614,38.873 47.614,34.428 NOR_2_1.9
NetDEMUX_2_2_14: DEMUX_2_2.14 NOR_2_1.6 | length 37.3
  Top Layer w0.255: NOR_2_1.6 44.311,33.389 44.311,35.623 44.12,35.814 44.12,37.655 44.311,37.846 44.311,46.089 43.573,46.827 43.573,65.544 DEMUX_2_2.14
NetDEMUX_2_2_15: DEMUX_2_2.15 NOR_2_1.3 | length 32.9
  Top Layer w0.255: NOR_2_1.3 41.529,40.513 41.529,46.596 42.037,47.104 42.037,67.485 44.275,69.723 DEMUX_2_2.15
NetDEMUX_3_1_1: "Main Connector.26" DEMUX_3_1.1 SP8T_Combo_3.10 | length 133.2
  Top Layer w0.254: v1(93.929,22.098) 95.682,22.098 96.825,20.955 SP8T_Combo_3.10
  Top Layer w0.255: v1(86.614,67.716) 86.614,52.121 89.801,48.934 89.801,41.275 90.586,40.49 90.586,30.298 90.145,29.857 90.145,21.819 86.741,18.415
  Bottom Layer w0.254: 86.741,18.415 90.246,18.415 v1(93.929,22.098)
  Bottom Layer w0.255: DEMUX_3_1.1 25.654,72.263 27.051,70.866 61.821,70.866 64.361,68.326 70.509,68.326 72.783,66.052 75.553,66.052 77.827,68.326 81.616,68.326 82.226,67.716 v1(86.614,67.716)
NetDEMUX_3_1_2: "Main Connector.25" DEMUX_3_1.2 SP8T_Combo_3.9 | length 134.7
  Top Layer w0.254: 86.741,20.955 88.875,23.089 88.875,29.908 90.078,31.111 90.078,33.227 89.293,34.012 89.293,47.918 v1(87.173,50.038) ; v1(92.685,27.305) 95.619,27.305 96.254,26.67 96.254,24.904 SP8T_Combo_3.9
  Bottom Layer w0.254: DEMUX_3_1.2 29.095,63.234 52.65,63.234 57.542,58.342 69.528,58.342 71.978,55.892 75.553,55.892 78.081,58.42 84.607,58.42 87.173,55.855 v1(87.173,50.038) ; 86.741,20.955 85.471,22.225 85.471,29.21 85.979,29.718 90.272,29.718 v1(92.685,27.305)
NetDEMUX_3_1_3: "Main Connector.24" DEMUX_3_1.3 SP8T_Combo_3.7 | length 134.7
  Top Layer w0.254: 86.741,23.495 87.872,24.626 87.872,30.353 v1(89.015,31.496) ; v1(94.996,33.299) 96.52,31.775 96.52,30.226 96.774,29.972 97.409,29.972 97.663,29.718 SP8T_Combo_3.7
  Top Layer w0.255: DEMUX_3_1.3 23.698,66.091 23.698,41.54 23.56,41.402 23.56,33.969 24.206,33.323 24.206,24.943 v1(25.019,24.13)
  Bottom Layer w0.254: v1(89.015,31.496) 90.818,33.299 v1(94.996,33.299)
  Bottom Layer w0.255: v1(25.019,24.13) 71.584,24.13 75.902,19.812 87.63,19.812 87.884,20.066 87.884,22.352 86.741,23.495
NetDEMUX_3_1_6: "Main Connector.27" DEMUX_3_1.6 | length 143.5
  Top Layer w0.254: v1(35.966,59.258) 35.966,59.182 36.678,58.471 39.878,58.471 41.097,59.69 41.097,68.605 44.12,71.628 44.12,74.244 47.625,77.749 64.414,77.749 65.71,76.454 65.71,71.171 67.894,71.171 67.894,72.263 68.986,73.355 75.438,73.355 76.53,72.263 76.53,68.58 78.283,66.827 78.283,41.504 79.248,40.538 79.248,16.053 80.518,14.783 85.649,14.783 86.741,15.875
  Bottom Layer w0.254: DEMUX_3_1.6 26.822,59.563 27.965,58.42 33.096,58.42 33.934,59.258 v1(35.966,59.258)
NetDEMUX_3_1_7: DEMUX_3_1.7 NOR_3_2.11 SPDT_3_2.5 | length 77.5
  Top Layer w0.254: SPDT_3_2.5 10.541,6.35 13.03,6.35 14.085,7.405 14.085,35.421 NOR_3_2.11
  Bottom Layer w0.254: NOR_3_2.11 12.573,39.751 12.573,43.612 5.461,50.724 5.461,56.134 7.493,58.166 21.463,58.166 DEMUX_3_1.7
NetDEMUX_3_1_9: DEMUX_3_1.9 NOR_3_2.8 SPDT_3_2.4 | length 115.6
  Top Layer w0.255: v1(6.477,52.553) 4.191,50.267 4.191,5.842 5.207,4.826 6.743,4.826 ; SPDT_3_2.4 8.267,8.902 8.267,6.35 6.743,4.826 ; NOR_3_2.8 15.494,6.858 13.462,4.826 6.743,4.826
  Bottom Layer w0.255: v1(6.477,52.553) 6.477,54.61 7.493,55.626 23.749,55.626 24.892,54.483 DEMUX_3_1.9
NetDEMUX_3_1_10: DEMUX_3_1.10 NOR_3_2.5 SPDT_3_2.3 | length 65.2
  Top Layer w0.254: NOR_3_2.5 10.541,31.623 10.541,13.716 SPDT_3_2.3
  Top Layer w0.255: NOR_3_2.5 9.246,35.662 9.246,39.903 15.316,45.974 15.316,51.816 ; DEMUX_3_1.10 31.369,55.88 31.369,52.603 v1(30.582,51.816)
  Bottom Layer w0.255: 15.316,51.816 v1(30.582,51.816)
NetDEMUX_3_1_11: DEMUX_3_1.11 NOR_3_2.2 SPDT_3_2.2 | length 79.1
  Top Layer w0.254: NOR_3_2.2 6.235,40.271 6.235,34.1 7.442,32.893 8.382,32.893 9.017,32.258 9.017,28.067 8.255,27.305 8.255,16.256 SPDT_3_2.2
  Bottom Layer w0.254: NOR_3_2.2 4.445,45.339 4.445,61.722 5.969,63.246 26.543,63.246 DEMUX_3_1.11
NetDEMUX_3_1_12: DEMUX_3_1.12 NOR_3_1.11 SPDT_3_1.5 | length 75.2
  Top Layer w0.254: v1(25.222,42.418) 25.222,61.405 29.603,65.786 30.861,65.786 31.369,65.278 31.369,63.246 DEMUX_3_1.12
  Top Layer w0.255: SPDT_3_1.5 24.155,5.69 25.654,5.69 27.051,7.087 27.051,27.484 25.793,28.742 25.793,29.678 26.747,30.632 27.445,30.632 28.055,31.242 28.055,35.699 NOR_3_1.11
  Bottom Layer w0.254: v1(25.222,42.418) 25.222,38.532 NOR_3_1.11
NetDEMUX_3_1_13: DEMUX_3_1.13 NOR_3_1.8 SPDT_3_1.4 | length 91.2
  Top Layer w0.254: SPDT_3_1.4 21.209,8.89 21.209,5.766 22.073,4.902 27.686,4.902 29.083,6.299 29.083,41.922 27.686,43.319 27.154,43.319 ; NOR_3_1.8 28.563,30.849 28.563,41.91 27.154,43.319 ; DEMUX_3_1.13 28.569,62.986 28.569,48.357 25.793,45.581 25.793,43.942 26.416,43.319 27.154,43.319
NetDEMUX_3_1_14: DEMUX_3_1.14 NOR_3_1.5 SPDT_3_1.3 | length 65.9
  Top Layer w0.254: NOR_3_1.5 20.435,33.159 20.435,31.218 19.558,30.341 18.796,30.341 18.173,29.718 18.173,16.752 SPDT_3_1.3
  Top Layer w0.255: v1(24.587,34.671) 24.206,35.052 24.206,61.163 DEMUX_3_1.14
  Bottom Layer w0.255: NOR_3_1.5 24.206,34.29 v1(24.587,34.671)
NetDEMUX_3_1_15: DEMUX_3_1.15 NOR_3_1.2 SPDT_3_1.2 | length 65.7
  Top Layer w0.254: NOR_3_1.2 21.451,39.763 21.451,29.368 21.07,28.987 21.07,16.395 SPDT_3_1.2 ; 19.939,46.279 19.939,67.31 20.955,68.326 28.829,68.326 DEMUX_3_1.15
  Bottom Layer w0.254: NOR_3_1.2 20.447,43.053 20.447,45.771 19.939,46.279
NetDEMUX_3_2_1: "Main Connector.21" DEMUX_3_2.1 SP8T_Combo_3.2 | length 130.6
  Top Layer w0.254: v1(89.662,58.293) 91.833,56.122 91.833,43.307 92.618,42.522 92.618,31.08 SP8T_Combo_3.2
  Bottom Layer w0.254: DEMUX_3_2.1 9.537,70.854 23.863,70.854 26.391,68.326 60.655,68.326 65.735,63.246 67.85,63.246 72.664,58.432 74.93,58.432 77.204,60.706 83.464,60.706 85.877,58.293 v1(89.662,58.293) ; 86.741,31.115 87.531,30.325 93.373,30.325 SP8T_Combo_3.2
NetDEMUX_3_2_2: "Main Connector.22" DEMUX_3_2.2 SP8T_Combo_3.3 | length 205.6
  Top Layer w0.255: SP8T_Combo_3.3 95.123,25.095 96.52,23.698 96.764,22.362 99.304,22.362 103.378,18.288 v1(103.378,4.699)
  Bottom Layer w0.254: 86.741,28.575 89.281,26.035 SP8T_Combo_3.3
  Bottom Layer w0.255: DEMUX_3_2.2 2.159,63.754 2.159,4.953 4.191,2.921 101.6,2.921 v1(103.378,4.699)
NetDEMUX_3_2_3: "Main Connector.23" DEMUX_3_2.3 SP8T_Combo_3.4 | length 202
  Top Layer w0.255: SP8T_Combo_3.4 93.611,23.495 92.722,22.606 92.722,19.673 94.869,17.526 v1(102.362,17.526)
  Bottom Layer w0.254: 86.741,26.035 89.281,23.495 SP8T_Combo_3.4
  Bottom Layer w0.255: DEMUX_3_2.3 3.175,62.23 3.175,5.842 5.207,3.81 100.965,3.81 102.362,5.207 v1(102.362,17.526)
NetDEMUX_3_2_6: "Main Connector.28" DEMUX_3_2.6 | length 171.5
  Top Layer w0.254: v1(5.207,6.35) 5.207,47.31 9.767,51.87 9.767,57.924 DEMUX_3_2.6
  Bottom Layer w0.254: v1(5.207,6.35) 97.663,6.35 98.679,7.366 98.679,15.57 97.714,16.535 89.941,16.535 86.741,13.335
NetDEMUX_3_2_7: DEMUX_3_2.7 NOR_3_2.12 | length 21.6
  Top Layer w0.254: DEMUX_3_2.7 9.259,55.892 9.259,53.353 v1(8.153,52.248)
  Bottom Layer w0.254: v1(8.153,52.248) 13.386,47.015 13.386,41.478 NOR_3_2.12
NetDEMUX_3_2_9: DEMUX_3_2.9 NOR_3_2.9 | length 23.6
  Top Layer w0.254: NOR_3_2.9 16.637,32.893 16.637,53.594 DEMUX_3_2.9
NetDEMUX_3_2_10: DEMUX_3_2.10 NOR_3_2.6 | length 30.3
  Top Layer w0.255: NOR_3_2.6 5.727,33.897 5.727,47.002 DEMUX_3_2.10
NetDEMUX_3_2_11: DEMUX_3_2.11 NOR_3_2.3 | length 25.1
  Top Layer w0.254: NOR_3_2.3 14.021,45.517 14.021,54.407 15.494,55.88 16.625,55.88 16.879,56.134 16.879,58.432 DEMUX_3_2.11
NetDEMUX_3_2_12: DEMUX_3_2.12 NOR_3_1.12 | length 32.6
  Top Layer w0.254: 20.828,62.103 20.955,61.976 20.955,47.296 v1(22.658,45.593)
  Bottom Layer w0.254: DEMUX_3_2.12 20.828,62.103 ; v1(22.658,45.593) 23.495,45.593 25.781,43.307 27.178,43.307 28.067,42.418 28.067,40.513 NOR_3_1.12
NetDEMUX_3_2_13: DEMUX_3_2.13 NOR_3_1.9 | length 56.8
  Top Layer w0.254: DEMUX_3_2.13 14.605,65.786 14.605,70.358 15.24,70.993 18.339,70.993 18.796,70.536 18.796,46.216 18.173,45.593 18.173,43.307 19.66,43.307 22.504,40.462 22.504,31.953 22.708,31.75
  Bottom Layer w0.254: 22.708,31.75 NOR_3_1.9
NetDEMUX_3_2_14: DEMUX_3_2.14 NOR_3_1.6 | length 37.1
  Top Layer w0.254: DEMUX_3_2.14 17.387,65.544 17.387,54.619 17.157,54.388 17.157,33.897 NOR_3_1.6
NetDEMUX_3_2_15: DEMUX_3_2.15 NOR_3_1.3 | length 32
  Top Layer w0.254: DEMUX_3_2.15 17.907,67.564 17.907,47.232 17.665,46.99 17.665,41.009 NOR_3_1.3
"NetMain Connector_14": "Main Connector.14" SP3T_1.2 | length 14.4
  Bottom Layer w0.254: 84.201,10.795 85.471,9.525 89.484,9.525 89.738,9.779 96.393,9.779 SP3T_1.2
"NetMain Connector_15": "Main Connector.15" SP3T_1.3 | length 12
  Bottom Layer w0.254: 84.201,8.255 85.446,7.01 93.37,7.01 SP3T_1.3
"NetMain Connector_29": "Main Connector.29" SP3T_2.2 | length 12.4
  Bottom Layer w0.254: 86.741,10.795 93.599,10.795 SP3T_2.2
"NetMain Connector_30": "Main Connector.30" SP3T_2.3 | length 10.9
  Top Layer w0.254: 86.741,8.255 88.519,8.255 SP3T_2.3
NetNOR_1_1_1: NOR_1_1.1 SPDT_1_1.7 | length 41.2
  Top Layer w0.254: v1(77.089,43.205) 77.597,42.697 77.597,36.858 78.474,35.981 78.474,16.244 SPDT_1_1.7
  Bottom Layer w0.254: NOR_1_1.1 66.573,44.45 67.818,43.205 v1(77.089,43.205)
NetNOR_1_1_4: NOR_1_1.4 SPDT_1_1.8 | length 35.2
  Top Layer w0.254: NOR_1_1.4 66.853,35.509 66.853,33.769 67.31,33.312 69.05,33.312 69.875,32.487 69.875,14.859 v1(68.859,13.843)
  Bottom Layer w0.254: v1(68.859,13.843) 76.073,13.843 SPDT_1_1.8
NetNOR_1_1_10: NOR_1_1.10 SPDT_1_1.9 | length 36.7
  Top Layer w0.254: NOR_1_1.10 72.021,33.159 72.021,11.062 74.447,8.636 75.438,8.636 75.946,8.128 75.946,6.807 76.391,6.362 77.978,6.362 78.474,6.858 78.474,8.902 SPDT_1_1.9
NetNOR_1_1_13: NOR_1_1.13 SPDT_1_1.10 | length 38
  Top Layer w0.254: v1(76.581,41.173) 76.2,40.792 76.2,8.636 SPDT_1_1.10
  Bottom Layer w0.254: NOR_1_1.13 73.889,41.173 v1(76.581,41.173)
NetNOR_1_2_1: NOR_1_2.1 SPDT_1_2.7 | length 46.4
  Top Layer w0.254: SPDT_1_2.7 67.335,17.805 67.335,30.251 v1(68.351,31.267)
  Bottom Layer w0.254: NOR_1_2.1 60.845,37.961 62.496,37.961 63.119,37.338 63.119,33.528 62.484,32.893 61.48,32.893 60.845,32.258 60.845,31.242 61.468,30.619 62.623,30.619 64.885,32.881 66.738,32.881 v1(68.351,31.267)
NetNOR_1_2_4: NOR_1_2.4 SPDT_1_2.8 | length 47.9
  Top Layer w0.254: NOR_1_2.4 57.455,33.731 57.455,7.696 60.198,4.953 64.885,4.953 66.282,6.35 66.282,10.934 SPDT_1_2.8
NetNOR_1_2_10: NOR_1_2.10 SPDT_1_2.9 | length 37.1
  Top Layer w0.254: NOR_1_2.10 59.956,32.27 59.956,10.427 61.759,8.624 63.246,8.624 63.373,8.497 63.373,6.743 63.754,6.362 65.278,6.362 65.774,6.858 65.774,8.902 SPDT_1_2.9
NetNOR_1_2_13: NOR_1_2.13 SPDT_1_2.10 | length 35.8
  Top Layer w0.254: NOR_1_2.13 63.615,40.271 63.615,27.952 63.234,27.571 63.234,9.779 64.643,8.37 SPDT_1_2.10
NetNOR_2_1_1: NOR_2_1.1 SPDT_2_1.7 | length 38.7
  Top Layer w0.254: 45.085,46.863 45.085,39.003 46.152,37.937 46.152,24.702 52.566,18.288 52.566,16.244 SPDT_2_1.7
  Bottom Layer w0.254: NOR_2_1.1 45.085,46.863
NetNOR_2_1_4: NOR_2_1.4 SPDT_2_1.8 | length 29.3
  Top Layer w0.254: v1(45.136,36.83) 45.136,24.518 50.292,19.362 50.292,13.716 SPDT_2_1.8
  Bottom Layer w0.254: NOR_2_1.4 v1(45.136,36.83)
NetNOR_2_1_10: NOR_2_1.10 SPDT_2_1.9 | length 28.6
  Top Layer w0.255: NOR_2_1.10 51.423,33.159 51.423,30.925 51.105,30.607 50.038,30.607 49.149,29.718 49.149,22.467 53.074,18.542 53.074,11.672 SPDT_2_1.9
NetNOR_2_1_13: NOR_2_1.13 SPDT_2_1.10 | length 37.1
  Top Layer w0.255: NOR_2_1.13 51.943,40.259 51.943,21.374 54.09,19.227 54.09,10.148 SPDT_2_1.10
NetNOR_2_2_1: NOR_2_2.1 SPDT_2_2.7 | length 32.3
  Top Layer w0.254: NOR_2_2.1 36.715,38.977 36.715,29.603 37.084,29.234 37.084,16.51 SPDT_2_2.7
NetNOR_2_2_4: NOR_2_2.4 SPDT_2_2.8 | length 28.7
  Top Layer w0.254: NOR_2_2.4 32.627,35.445 32.627,15.912 34.696,13.843 37.211,13.843 SPDT_2_2.8
NetNOR_2_2_10: NOR_2_2.10 SPDT_2_2.9 | length 34.5
  Top Layer w0.254: SPDT_2_2.9 37.338,8.89 37.338,6.858 37.846,6.35 39.116,6.35 40.132,7.366 40.132,19.073 40.005,19.2 40.005,33.147 NOR_2_2.10
NetNOR_2_2_13: NOR_2_2.13 SPDT_2_2.10 | length 36.6
  Top Layer w0.255: SPDT_2_2.10 39.624,8.636 39.624,18.565 37.719,20.47 37.719,29.378 37.223,29.874 37.223,40.271 NOR_2_2.13
NetNOR_3_1_1: NOR_3_1.1 SPDT_3_1.7 | length 31.7
  Top Layer w0.254: NOR_3_1.1 23.052,40.702 23.052,33.247 23.622,32.678 23.622,16.383 SPDT_3_1.7
NetNOR_3_1_4: NOR_3_1.4 SPDT_3_1.8 | length 27.9
  Top Layer w0.254: NOR_3_1.4 20.943,35.191 20.943,29.87 20.562,29.489 20.562,15.1 21.819,13.843 23.622,13.843 SPDT_3_1.8
NetNOR_3_1_10: NOR_3_1.10 SPDT_3_1.9 | length 35.2
  Top Layer w0.254: SPDT_3_1.9 23.749,8.89 23.749,6.858 24.257,6.35 25.527,6.35 26.543,7.366 26.543,26.936 25.285,28.194 25.285,32.651 NOR_3_1.10
NetNOR_3_1_13: NOR_3_1.13 SPDT_3_1.10 | length 36.3
  Top Layer w0.254: SPDT_3_1.10 26.035,8.636 26.035,25.121 24.777,26.379 24.777,32.898 25.603,33.724 25.603,40.589 NOR_3_1.13
NetNOR_3_2_1: NOR_3_2.1 SPDT_3_2.7 | length 32
  Top Layer w0.254: v1(10.262,38.227) 13.069,35.42 13.069,16.244 SPDT_3_2.7
  Bottom Layer w0.254: NOR_3_2.1 10.262,42.062 v1(10.262,38.227)
NetNOR_3_2_4: NOR_3_2.4 SPDT_3_2.8 | length 31.1
  Bottom Layer w0.254: NOR_3_2.4 6.223,35.179 6.223,13.462 8.255,11.43 10.795,11.43 SPDT_3_2.8
NetNOR_3_2_10: NOR_3_2.10 SPDT_3_2.9 | length 45.6
  Bottom Layer w0.254: SPDT_3_2.9 10.668,8.763 7.366,8.763 5.715,10.414 5.715,36.83 6.858,37.973 8.484,37.973 12.167,34.29 NOR_3_2.10
NetNOR_3_2_13: NOR_3_2.13 SPDT_3_2.10 | length 35.9
  Top Layer w0.255: SPDT_3_2.10 13.577,9.132 13.577,39.993 NOR_3_2.13
VCC: NOR_1_1.14 NOR_1_2.14 NOR_2_1.14 NOR_2_2.14 NOR_3_1.14 NOR_3_2.14 | length 72.2
  Top Layer w0.254: NOR_2_1.14 51.245,45.403 v1(51.245,49.594)
  Bottom Layer w0.254: NOR_3_1.14 28.067,45.593 37.719,45.593 NOR_2_2.14 38.862,45.212 43.815,50.165 50.673,50.165 v1(51.245,49.594) ; NOR_2_1.14 51.435,45.593 57.582,45.593 58.725,44.45 NOR_1_2.14 63.119,45.593 72.009,45.593 NOR_1_1.14
  Bottom Layer w0.255: NOR_3_2.14 18.161,47.117 24.257,47.117 NOR_3_1.14

## Silkscreen, mask and mechanical layers (free items; w line width, h text height)
Top Overlay:
  text "Designed by: Edinam Tettevi" at 0.889,79.629 h1.52

## Text inside footprints (layer, text, board x,y; h text height)
"Main Connector": Top Overlay "16" at 86.233,47.371 h1.27 r270; Top Overlay "1" at 83.693,46.355 h1.27 r270; Top Overlay "15" at 83.693,6.731 h1.27 r270; Top Overlay "30" at 86.233,6.731 h1.27 r270
SP8T_Combo_1: Top Overlay "1" at 94.234,73.533 h1.27 r270; Top Overlay "5" at 94.234,59.309 h1.27 r270; Top Overlay "10" at 96.774,59.309 h1.27 r270; Top Overlay "6" at 96.774,73.533 h1.27 r270
SP8T_Combo_2: Top Overlay "1" at 94.488,53.721 h1.27 r270; Top Overlay "5" at 94.488,39.497 h1.27 r270; Top Overlay "10" at 97.028,39.497 h1.27 r270; Top Overlay "6" at 97.028,53.721 h1.27 r270
SP8T_Combo_3: Top Overlay "1" at 94.615,33.655 h1.27 r270; Top Overlay "5" at 94.615,19.431 h1.27 r270; Top Overlay "10" at 97.155,19.431 h1.27 r270; Top Overlay "6" at 97.155,33.655 h1.27 r270
SPDT_1_1: Top Overlay "1" at 74.295,20.193 h1.27 r270; Top Overlay "5" at 74.295,5.969 h1.27 r270; Top Overlay "10" at 76.835,5.969 h1.27 r270; Top Overlay "6" at 76.835,20.193 h1.27 r270
SPDT_1_2: Top Overlay "1" at 61.595,20.193 h1.27 r270; Top Overlay "5" at 61.595,5.969 h1.27 r270; Top Overlay "10" at 64.135,5.969 h1.27 r270; Top Overlay "6" at 64.135,20.193 h1.27 r270
SPDT_2_1: Top Overlay "1" at 48.387,20.193 h1.27 r270; Top Overlay "5" at 48.387,5.969 h1.27 r270; Top Overlay "10" at 50.927,5.969 h1.27 r270; Top Overlay "6" at 50.927,20.193 h1.27 r270
SPDT_2_2: Top Overlay "1" at 35.433,20.193 h1.27 r270; Top Overlay "5" at 35.433,5.969 h1.27 r270; Top Overlay "10" at 37.973,5.969 h1.27 r270; Top Overlay "6" at 37.973,20.193 h1.27 r270
SPDT_3_1: Top Overlay "1" at 21.844,20.193 h1.27 r270; Top Overlay "5" at 21.844,5.969 h1.27 r270; Top Overlay "10" at 24.384,5.969 h1.27 r270; Top Overlay "6" at 24.384,20.193 h1.27 r270
SPDT_3_2: Top Overlay "1" at 8.89,20.193 h1.27 r270; Top Overlay "5" at 8.89,5.969 h1.27 r270; Top Overlay "10" at 11.43,5.969 h1.27 r270; Top Overlay "6" at 11.43,20.193 h1.27 r270